# Altium PCB PCB.PcbDoc
Units mil, origin at the board's own origin, x right, y up, seen from the top; angles counter-clockwise.
Board outline 3930 x 2120 mil, 2 copper layers (Top Layer, Bottom Layer); 35 components, 48 nets, 170 pads, 29 vias.
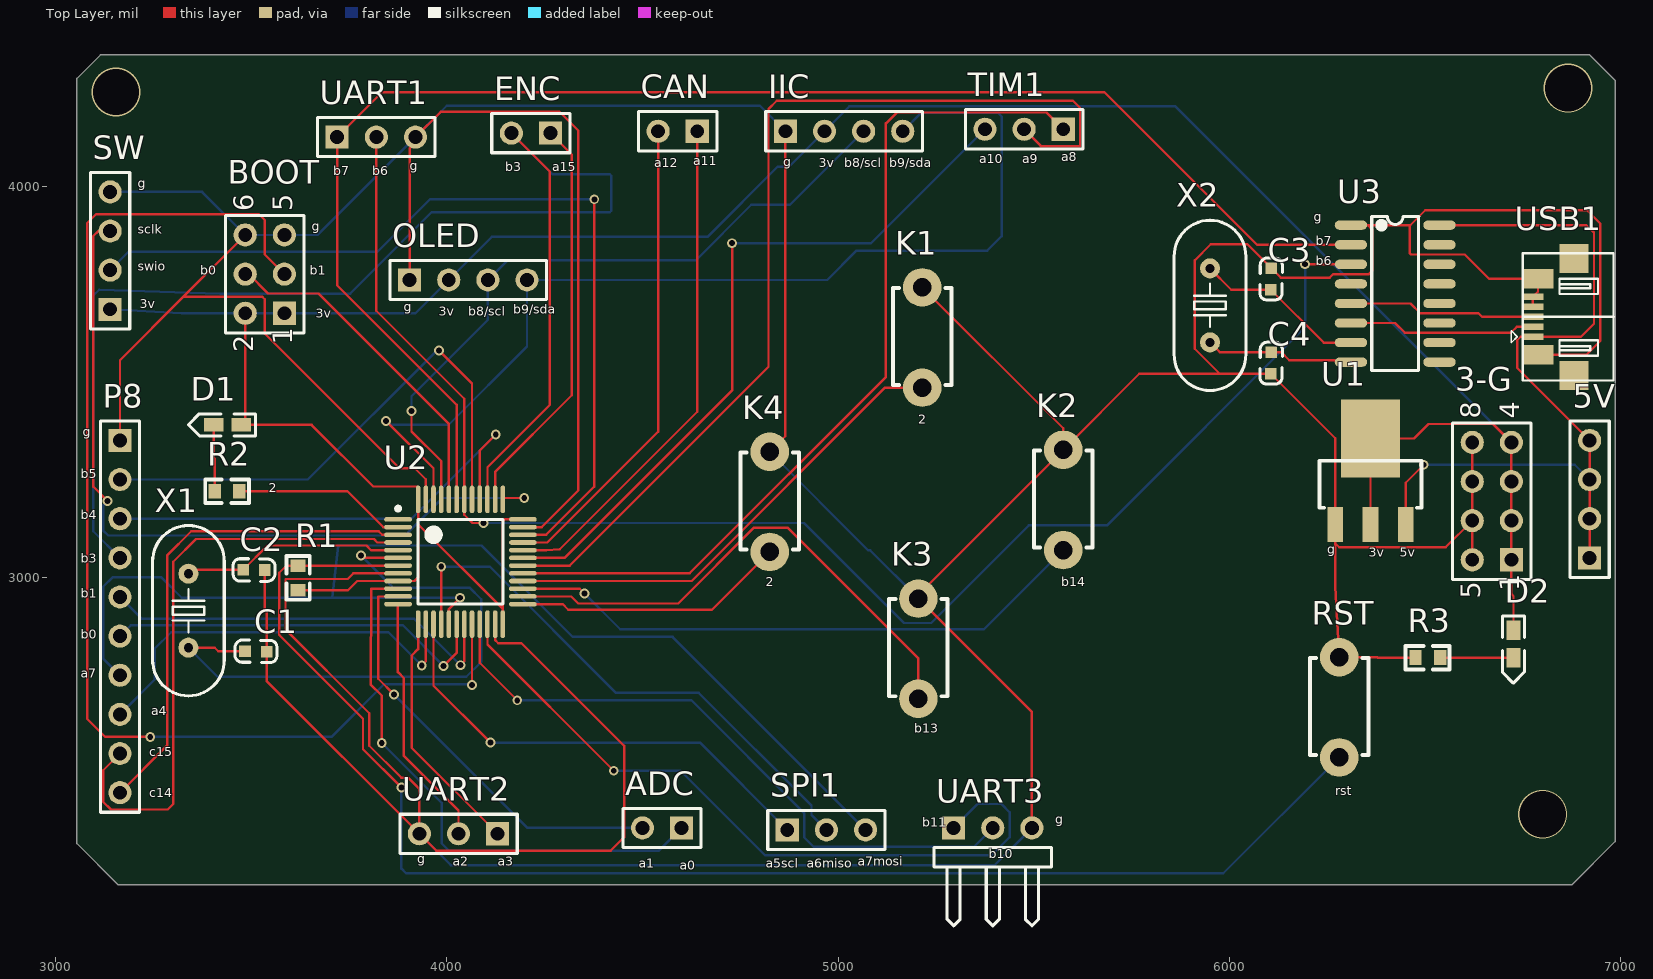
[diagram p0: Top Layer view]
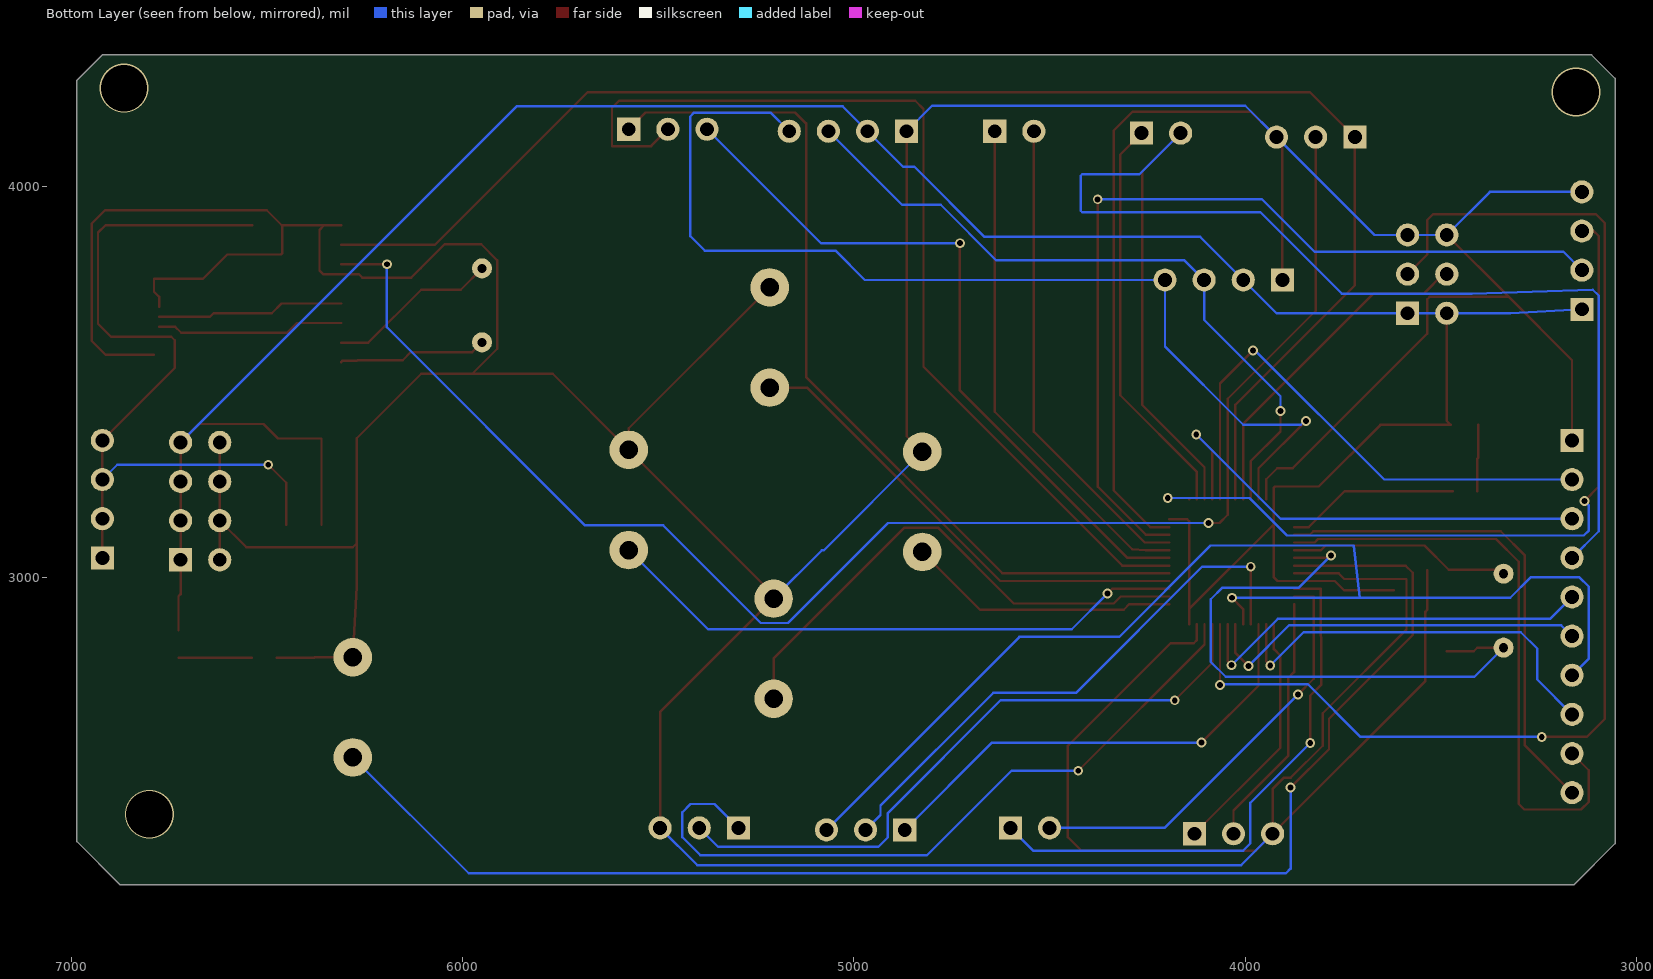
[diagram p1: Bottom Layer view, seen from below]
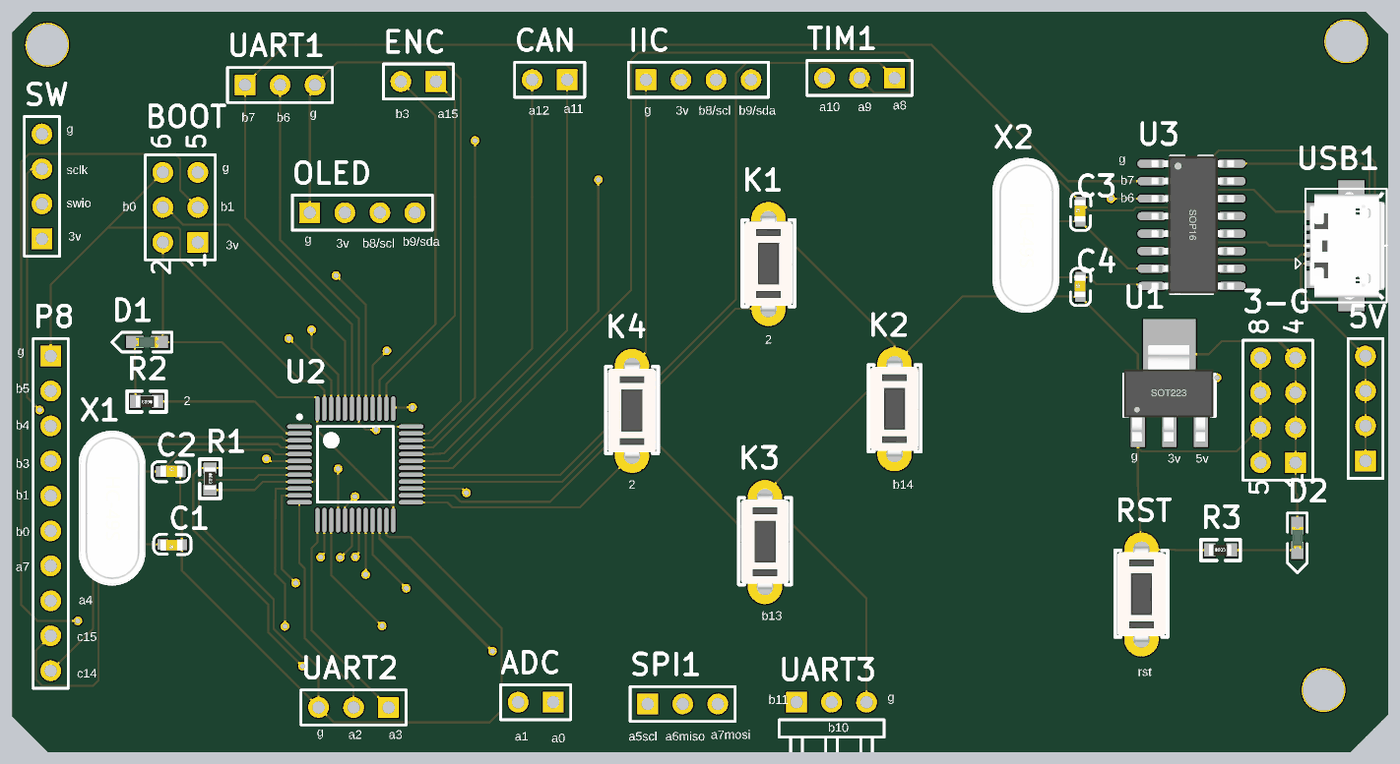
[diagram p2: 3D render of the assembled board from above, using the file's embedded part models]

## Layer stack, top to bottom
Top Solder: solder mask 0.4, Solder Resist, Dk 3.5
Top Layer: signal copper 1.4
Dielectric 1: dielectric 12.6, FR-4, Dk 4.8
Bottom Layer: signal copper 1.4
Bottom Solder: solder mask 0.4, Solder Resist, Dk 3.5

## Board outline
3055,2320 3055,4275 3115,4335 6920,4335 6985,4270 6985,2325 6875,2215 3160,2215

## Design rules (kind name [scope] priority, off if disabled: settings)
Clearance [All] p1: gap=10 ignorepadtopadclearanceinfootprint=FALSE except(0: Arc-Hole Track-Hole SMDPad-Hole THPad-Hole Via-Hole Fill-Hole Poly-Hole Region-Hole Text-Hole)
PolygonConnect [All] p1: connectstyle=Relief reliefconductorwidth=10 reliefentries=4 polygonreliefangle="90 Angle" airgapwidth=10
RoutingVias [All] p1: holewidth=15 width=25 viastyle="Through Hole" minholewidth=15 minwidth=25 maxholewidth=28 maxwidth=50
SolderMaskExpansion [All] p1: expansion=4 istentingtop=FALSE
Width [All] p1: maxlimit=10 minlimit=6 preferedwidth=6 minimp=50.000000 maximp=50.000000 favimp=50.000000
30 further rules are at their usual default settings.

## Components (designator, comment, footprint, x,y, rotation, side; value= is the part's Value field where it differs from the comment)
3-G "3-G" HDR2X4_CEN 6720,3045 r90 top
5V "5V" HDR1X4 6920,3050 r90 top
ADC "ADC" HDR1X2 4600,2360 r180 top
BOOT "BOOT" HDR2X3 3585,3675 r90 top
C1 "CAP" 0603C 3540,2810 r180 top
C2 "CAP" 0603C 3480,3020 r0 top
C3 "CAP" 0603C 6105,3735 r90 top
C4 "CAP" 0603C 6105,3520 r90 top
CAN "CAN" HDR1X2 4640,4140 r180 top
D1 "LED" LED-0603B 3475,3390 r180 top
D2 "LED" LED-0603B 6725,2865 r270 top
ENC "ENC" HDR1X2 4265,4135 r180 top
IIC "IIC" HDR1X4 4865,4140 r0 top
K1 "KEY" DIP-3X6X4.3 5215,3485 r90 top
K2 "KEY" DIP-3X6X4.3 5575,3070 r90 top
K3 "KEY" DIP-3X6X4.3 5205,2690 r90 top
K4 "KEY" DIP-3X6X4.3 4825,3065 r90 top
OLED "IIC-OLED" HDR1X4 3905,3760 r0 top
P8 "Header 10" HDR1X10 3165,3350 r270 top
R1 "RES" 0603R 3620,3030 r270 top
R2 "RES" 0603R 3470,3220 r180 top
R3 "RES" 0603R 6475,2795 r0 top
RST "KEY" DIP-3X6X4.3 6280,2540 r90 top
SPI1 "SPI" HDR1X3 4870,2355 r0 top
SW "SWD" HDR1X4 3140,3685 r90 top
TIM1 "TIM1" HDR1X3 5575,4145 r180 top
U1 "AMS1117" SOT223 6360,3135 r0 top
U2 "STM32F103C8T6" 48P 4035,3040 r0 top
U3 "CH340G" SOP16 6310,3900 r0 top
UART1 "UART1" HDR1X3 3720,4125 r0 top
UART2 "UART2" HDR1X3 4130,2345 r180 top
UART3 "UART3" HDR1X3H 5295,2360 r0 top
USB1 "Micro-USB" USB-MICRO_A 6775,3615 r90 top
X1 "XTAL-2P" "OSC HC-49S" 3340,2915 r270 top
X2 "XTAL-2P" "OSC HC-49S" 5950,3695 r270 top

## Footprints (in the part's own frame and the unit in brackets; to place one, negate y for a bottom-side part, rotate by r counter-clockwise, add the part's x,y. Pads: shape width x height; smd on the part's side, far side on the other; paste and mask are expansions set on the pad)
48P [mm]
  oval 1.8x0.3 smd: 1(-4.05,2.75) 2(-4.05,2.25) 3(-4.05,1.75) 4(-4.05,1.25) 5(-4.05,0.75) 6(-4.05,0.25) 7(-4.05,-0.25) 8(-4.05,-0.75) 9(-4.05,-1.25) 10(-4.05,-1.75) 11(-4.05,-2.25) 12(-4.05,-2.75) 25(4.05,-2.75) 26(4.05,-2.25) 27(4.05,-1.75) 28(4.05,-1.25) 29(4.05,-0.75) 30(4.05,-0.25) 31(4.05,0.25) 32(4.05,0.75) 33(4.05,1.25) 34(4.05,1.75) 35(4.05,2.25) 36(4.05,2.75)
  oval 0.3x1.8 smd: 13(-2.75,-4.05) 14(-2.25,-4.05) 15(-1.75,-4.05) 16(-1.25,-4.05) 17(-0.75,-4.05) 18(-0.25,-4.05) 19(0.25,-4.05) 20(0.75,-4.05) 21(1.25,-4.05) 22(1.75,-4.05) 23(2.25,-4.05) 24(2.75,-4.05) 37(2.75,4.05) 38(2.25,4.05) 39(1.75,4.05) 40(1.25,4.05) 41(0.75,4.05) 42(0.25,4.05) 43(-0.25,4.05) 44(-0.75,4.05) 45(-1.25,4.05) 46(-1.75,4.05) 47(-2.25,4.05) 48(-2.75,4.05)
  silkscreen extent -4.17,-2.75 2.75,3.57, body extent -3.5,-3.5 3.5,3.5, height 1.6
0603C [mil]
  rect 30x30 smd: 1(0.21,-0.35) 2(55.21,-1.35)
  silkscreen extent -26,-30 81,28, body extent -1,-15 62,17, height 12
0603R [mm]
  rect 0.8x0.965 smd: 1(0,0) 2(1.6,0)
  silkscreen extent -0.64,-0.76 2.21,0.76, body extent -0.04,-0.41 1.56,0.41, height 0.45
DIP-3X6X4.3 [mm]
  round 2.5 hole 1.2: 1(0,0) 3(6.5,0)
  silkscreen extent 0.16,-1.9 6.46,1.9, body extent -0.64,-1.75 7.19,1.75, height 4.31
HDR1X2 [mm] "Connector; Header; 2 Position"
  rect 1.5x1.5 hole 0.9: 1(0,0)
  round 1.5 hole 0.9: 2(2.54,0)
  silkscreen extent -1.27,-1.27 3.81,1.27
HDR1X3 [mm] "Connector; Header; 3 Position"
  rect 1.5x1.5 hole 0.9: 1(0,0)
  round 1.5 hole 0.9: 2(2.54,0) 3(5.08,0)
  silkscreen extent -1.27,-1.27 6.35,1.27
HDR1X3H [mm] "Connector; Header; 3 Position; Right Angle"
  rect 1.5x1.5 hole 0.9: 1(0,0)
  round 1.5 hole 0.9: 2(2.54,0) 3(5.08,0)
  silkscreen extent -1.27,-6.35 6.35,-1.27
HDR1X4 [mm] "Connector; Header; 4 Position"
  rect 1.5x1.5 hole 0.9: 1(0,0)
  round 1.5 hole 0.9: 2(2.54,0) 3(5.08,0) 4(7.62,0)
  silkscreen extent -1.27,-1.27 8.89,1.27
HDR1X10 [mm] "Connector; Header; 10 Position"
  rect 1.5x1.5 hole 0.9: 1(0,0)
  round 1.5 hole 0.9: 2(2.54,0) 3(5.08,0) 4(7.62,0) 5(10.16,0) 6(12.7,0) 7(15.24,0) 8(17.78,0) 9(20.32,0) 10(22.86,0)
  silkscreen extent -1.27,-1.27 24.13,1.27
HDR2X3 [mm] "Connector; Header; 3x2 Position"
  rect 1.5x1.5 hole 0.9: 1(0,0)
  round 1.5 hole 0.9: 2(0,2.54) 3(2.54,0) 4(2.54,2.54) 5(5.08,0) 6(5.08,2.54)
  silkscreen extent -1.27,-1.27 6.35,3.81
HDR2X4_CEN [mm] "Connector; Header; 4x2 Position"
  rect 1.5x1.5 hole 0.9: 1(0,0)
  round 1.5 hole 0.9: 2(2.54,0) 3(5.08,0) 4(7.62,0) 5(0,2.54) 6(2.54,2.54) 7(5.08,2.54) 8(7.62,2.54)
  silkscreen extent -1.27,-1.27 8.89,3.81
LED-0603B [mil]
  rect 50x35 smd: A(0,0.26) K(70,0.26)
  silkscreen extent -36,-28 135,28, body extent 4,-15 66,17, height 24
"OSC HC-49S" [mm]
  round 1.3 hole 0.6: 1(-2.4,0) 2(2.4,0)
  silkscreen extent -5.52,-2.32 5.52,2.33, body extent -5.53,-2.29 5.53,2.36, height 4.13
SOP16 [mm]
  oval 2.1x0.6 smd: 1(0,0) 2(0,-1.27) 3(0,-2.54) 4(0,-3.81) 5(0,-5.08) 6(0,-6.35) 7(0,-7.62) 8(0,-8.89) 9(5.75,-8.89) 10(5.75,-7.62) 11(5.75,-6.35) 12(5.75,-5.08) 13(5.75,-3.81) 14(5.75,-2.54) 15(5.75,-1.27) 16(5.75,0)
  silkscreen extent 1.35,-9.44 4.4,0.56, body extent -0.04,-9.45 5.97,0.56, height 1.9
SOT223 [mil]
  rect 40x90 smd: 1(-90,0) 2(0,0) 3(90,0)
  rect 150x200 smd: 2(0,220)
  silkscreen extent -130,43 130,163, body extent -130,-30 126,246, height 65
USB-MICRO_A [mm]
  rect 1.9x1.9 smd: 0(-2.515,-2.667) 0(5.08,-2.667)
  rect 0.4x1.4 smd: 1(0,0) 2(0.648,0) 3(1.295,0) 4(1.943,0) 5(2.591,0)
  rect 1.25x2 smd: 5(-1.168,-0.33) 5(3.759,-0.33)
  silkscreen extent -2.84,-5.24 5.41,1.4, body extent -2.71,-5.08 5.25,0.34, height 2.69

## Part data
3-G: library part "Header 4X2A", "Header, 4-Pin, Dual row", LatestRevisionDate=17-Jul-2002, LatestRevisionNote="Re-released for DXP Platform.", Publisher="Altium Limited"
5V IIC OLED SW: library part "Header 4", "Header, 4-Pin", LatestRevisionDate=17-Jul-2002, LatestRevisionNote="Re-released for DXP Platform.", Publisher="Altium Limited"
ADC CAN ENC: library part "Header 2", "Header, 2-Pin", LatestRevisionDate=17-Jul-2002, LatestRevisionNote="Re-released for DXP Platform.", Publisher="Altium Limited"
BOOT: library part "Header 3X2", "Header, 3-Pin, Dual row", LatestRevisionDate=17-Jul-2002, LatestRevisionNote="Re-released for DXP Platform.", Publisher="Altium Limited"
C1 C2 C3 C4: "无极性电容"
P8: "Header, 10-Pin", LatestRevisionDate=17-Jul-2002, LatestRevisionNote="Re-released for DXP Platform.", Publisher="Altium Limited"
SPI1 TIM1 UART1 UART2: library part "Header 3", "Header, 3-Pin", LatestRevisionDate=17-Jul-2002, LatestRevisionNote="Re-released for DXP Platform.", Publisher="Altium Limited"
U1: "三端稳压芯片"
UART3: library part "Header 3H", "Header, 3-Pin, Right Angle", LatestRevisionDate=17-Jul-2002, LatestRevisionNote="Re-released for DXP Platform.", Publisher="Altium Limited"
X1 X2: "2脚无源脚晶振"

## Via types
v1: diameter 25, hole 15, Top Layer to Bottom Layer, 26 vias
v2: diameter 125, hole 118.11, Top Layer to Bottom Layer, 3 vias

## Nets (pads, with @x,y where several pads share a name; then routed paths per layer and width w, separated by ;. In a path a pad name is that pad's centre, name@x,y a point inside that pad or via, vN(x,y) a via of type N, cw(c..) or ccw(c..) an arc to the next point about the centre after c; other vN are vias at no path point)
3v: 3-G.1 3-G.2 3-G.3 3-G.4 BOOT.1 BOOT.2 D1.A D2.A IIC.2 OLED.2 R1.2 SW.1 U1.2 U2.9 U2.24 U2.36 U2.48 | length 7231.1
  Top Layer w6: BOOT.2 3485,3399.75 D1.A 3654.76,3389.74 3812.4,3232.1 3923.63,3232.1 3926.73,3229 U2.48 3926.73,3136 ; R1.2 3747.72,2967.01 3771.5,2990.79 U2.9 3917.52,2990.79 3926.73,3000 3926.73,3136 ; U2.24 4143.27,2919.46 ; U2.36 4148.27,3148.27 4143.27,3143.27 4143.27,2919.46 ; U1.2@6360,3135 6360,3355 6471,3355 6508,3392 6673,3392 3-G.4 3-G.3 3-G.2 3-G.1 6720,2957.26 6725.26,2952 D2.A ; 3926.73,3136 4143.27,2919.46
  Bottom Layer w6: SW.1 3323,3675 BOOT.2 BOOT.1 3920,3675 OLED.2 4115,3870 4666,3870 4845,4049 4874,4049 IIC.2 5028.53,4203.53 5861.47,4203.53 3-G.4
BOOT0: BOOT.4 U2.44 | length 871.7
  Top Layer w6: BOOT.4 3493.91,3775 3543.53,3725.38 3672.09,3725.38 4005.47,3392 U2.44
BOOT1/PB2: BOOT.3 U2.20 | length 3109.3
  Top Layer w6: v1(3242.47,2592.53) 3127.47,2592.53 3081,2639 3081,3905 3104,3928 3520,3928 3535,3913 3535,3825 BOOT.3 ; v1(4064.53,2725) U2.20
  Bottom Layer w6: v1(3242.47,2592.53) 3705.53,2592.53 3840,2727 4062.53,2727 v1(4064.53,2725)
D+: U3.5 USB1.3 | length 479.1
  Top Layer w6: U3.5 6462,3700 6487,3675 6636,3675 6645,3666 USB1.3
D-: U3.6 USB1.2 | length 481.8
  Top Layer w6: U3.6 6423,3650 6448,3625 6718.5,3625 6734,3640.5 USB1.2
GND: 3-G.5 3-G.6 3-G.7 3-G.8 BOOT.5 BOOT.6 C1.1 C2.2 C3.2 C4.1 IIC.1 K1.3 K2.3 K3.3 K4.3 OLED.1 P8.1 R3.1 RST.3 SW.4 U1.1 U2.8 U2.23 U2.35 U2.47 U3.1 UART1.3 UART2.3 UART3.3 USB1.4 USB1.5 | length 18333.3
  Top Layer w6: P8.1 3165,3555 3327.53,3717.53 ; BOOT.6 3327.53,3717.53 ; C2.2 3535.21,2916.58 3539.79,2912 C1.1 3539.79,2735.21 UART2.3 ; U2.8 3761.47,3010.47 3747,2996 3588,2996 3588,2867 3802,2653 3802,2570.08 3883.58,2488.5 3901,2488.5 3930,2459.5 UART2.3 ; OLED.1 3905,4095.64 3920,4110.64 UART1.3 3985,4190 4288,4190 4336,4142 4336,3222 4242.58,3128.58 U2.35 ; U2.47 3946.42,3251 3918.42,3279 3879,3279 3535,3623 3535,3710.53 3528,3717.53 3327.53,3717.53 ; U2.23 4123.58,2840 4131.58,2832 4191,2832 4453,2570 4453,2336 4419,2302 3973,2302 UART2.3 ; K4.3 4865,3360.91 IIC.1 ; K1.3 5575,3380.91 K2.3 ; UART3.3 5495,2655.91 K3.3 5205,2955.91 K2.3 ; U3.1 6353,3900 ; 6462,3900 6353,3900 ; R3.1 6377.91,2795 6377,2795.91 RST.3 6270,2976 6270,3087 ; 3-G.5 3-G.6 ; 3-G.8 3-G.7 3-G.6 ; USB1.4 6775,3717 6788,3730 6788,3763 6663,3763 6601,3825 6480,3825 6463.92,3825 6460.4,3828.51 6460.4,3898.4 6500,3938 6913,3938 6947,3904 6947,3604 6912,3569 USB1.5@6788,3569 ; K2.3 5769.31,3520.21 5974.79,3520.21 ; 5974.79,3520.21 5911,3584 5911,3810 5952,3851 6045.57,3851 C3.2 6130.57,3766 6256,3766 6265,3775 6356,3775 6365,3784 6365,3888 6353,3900 ; 5974.79,3520.21 C4.1 6270,3355.57 U1.1 6270,3087 ; 6270,3087 6280,3077 6552,3077 3-G.6
  Bottom Layer w6: SW.4 3375,3985 BOOT.6 BOOT.5 3670,3875 UART1.3 4000,4205 4800,4205 IIC.1 ; UART2.3 4010,2265 5400,2265 UART3.3 ; K4.3 5076.91,3069 5081.91,3069 K3.3
NetC1_2: C1.2 U2.6 X1.2 | length 1553.7
  Top Layer w6: X1.2 3407,2820.51 3416.16,2811.35 C1.2 ; v1(3781,3056) 3787.16,3049.84 U2.6
  Bottom Layer w6: X1.2 3414.51,2746 4050,2746 4088,2784 4088,2944 4058,2974 3863,2974 v1(3781,3056)
NetC2_1: C2.1 U2.5 X1.1 | length 570.3
  Top Layer w6: X1.1 3350.16,3019.65 C2.1 3542.07,3081.5 3794.53,3081.5 3806.5,3069.53 U2.5
NetC3_1: C3.1 U3.7 X2.1 | length 438.5
  Top Layer w6: X2.1 6004.28,3735.21 C3.1 6240.57,3600 U3.7
NetC4_2: C4.2 U3.8 X2.2 | length 380.9
  Top Layer w6: X2.2 5975.3,3575.21 C4.2 6132.35,3575.21 6152.57,3555 6268.15,3555 6269.77,3553.37 6306.63,3553.37 U3.8
NetD1_K: D1.K R2.2 | length 170.6
  Top Layer w6: D1.K 3405,3305.01 3407.01,3303 R2.2
NetD2_K: D2.K R3.2 | length 187.3
  Top Layer w6: R3.2 6631,2795 D2.K
PA0: ADC.1 U2.10 | length 1439.2
  Top Layer w6: v1(3834,2577) 3834,2697.92 3805.5,2726.42 3807.13,2971.1 U2.10
  Bottom Layer w6: v1(3834,2577) 3987,2424 3987,2320 4005,2302 4542,2302 ADC.1
PA1: ADC.2 U2.11 | length 1093.8
  Top Layer w6: v1(3865,2701) 3825,2741 3825,2951.42 U2.11
  Bottom Layer w6: v1(3865,2701) 4206,2360 ADC.2
PA2: U2.12 UART2.2 | length 651.5
  Top Layer w6: U2.12 3875,2931.73 3875,2758 3890.5,2742.5 3890.5,2544.08 4030,2404.58 UART2.2
PA3: U2.13 UART2.1 | length 633.2
  Top Layer w6: U2.13 3926.73,2816.73 3910.5,2800.5 3910.5,2564.5 UART2.1
PA4: P8.8 U2.14 | length 1049.3
  Top Layer w6: v1(3936,2775) 3946.42,2785.42 U2.14
  Bottom Layer w6: P8.8 3254,2739 3254,2818 3296,2860 3851,2860 v1(3936,2775)
PA5: SPI1.1 U2.15 | length 1213.7
  Top Layer w6: U2.15 3966.1,2723.31 v1(4111.41,2578)
  Bottom Layer w6: v1(4111.41,2578) 4647,2578 SPI1.1
PA6: SPI1.2 U2.16 | length 1423.8
  Top Layer w6: U2.16 v1(3985.79,3027.5)
  Bottom Layer w6: v1(3985.79,3027.5) 4110.1,3027.5 4432.6,2705 4644.03,2705 4932.01,2417.01 4932.01,2392.99 SPI1.2
PA7: P8.7 SPI1.3 U2.17 | length 3049.4
  Top Layer w6: U2.17 4005.47,2919.47 v1(4034,2948)
  Bottom Layer w6: P8.7 3122,2793 3122,2976 3146,3000 3271,3000 3323,2948 3707.1,2948 ; v1(4034,2948) 3707.1,2948 ; SPI1.3 4577,2848 4322.07,2848 4088.57,3081.5 3722.48,3081.5 3707.1,2948
PA8: TIM1.1 U2.29 | length 2265.7
  Top Layer w6: U2.29 4620.47,3010.47 5122,3512 5122,4160 5150,4188 5532,4188 TIM1.1
PA9: TIM1.2 U2.30 | length 2567.9
  Top Layer w6: U2.30 4314.16,3030.16 4822,3538 4822,4197 4843,4218 5600,4218 5618,4200 5618,4102 5518,4102 TIM1.2
PA10: TIM1.3 U2.31 | length 1854.5
  Top Layer w6: U2.31 4300.95,3049.84 4729,3477.9 v1(4729,3854)
  Bottom Layer w6: v1(4729,3854) 5084,3854 TIM1.3
PA11: CAN.1 U2.32 | length 1307.9
  Top Layer w6: U2.32 4254.53,3069.53 4288.49,3071.79 4640,3423.31 CAN.1
PA12: CAN.2 U2.33 | length 1230.5
  Top Layer w6: U2.33 4256.83,3089.21 4540,3372.38 CAN.2
PA15: ENC.1 U2.38 | length 1039.3
  Top Layer w6: U2.38 4123.58,3269.37 4319.49,3465.28 4319.49,4080.51 ENC.1
PB0: P8.6 U2.18 | length 1002
  Top Layer w6: v1(3992,2774) 4025.16,2807.16 U2.18
  Bottom Layer w6: P8.6 3193,2878 3888,2878 v1(3992,2774)
PB1: P8.5 U2.19 | length 1050.9
  Top Layer w6: v1(4035,2775.84) 4044.84,2785.68 U2.19
  Bottom Layer w6: P8.5 3221,2894 3916.84,2894 v1(4035,2775.84)
PB3: ENC.2 P8.4 U2.39 | length 3547.6
  Top Layer w6: U2.39 4103.9,3281.69 4263.53,3441.32 4263.53,4036.47 ENC.2
  Bottom Layer w6: P8.4 3097,3118 3097,3720 3112,3735 3421,3725 3753,3725 3961,3933 4416.49,3933 4420,3936.51 4420,4026.49 4416.49,4030 4270,4030 ENC.2
PB4: P8.3 U2.40 | length 1231.5
  Top Layer w6: U2.40 4084.21,3324.21 v1(4125,3365)
  Bottom Layer w6: P8.3 3910,3150 v1(4125,3365)
PB5: P8.2 U2.41 | length 1367.3
  Top Layer w6: v1(3980,3580) 4064.53,3495.47 U2.41
  Bottom Layer w6: P8.2 3645,3250 3975,3580 v1(3980,3580)
PB6: U2.42 U3.3 UART1.2 | length 3911.6
  Top Layer w6: UART1.2 3820,3681.24 4044.84,3456.39 U2.42 4044.84,3160 4065.84,3139 v1(4094,3139) ; v1(6193,3800) U3.3
  Bottom Layer w6: v1(4094,3139) 4912.69,3139 5168,2883.69 5237.69,2883.69 5487,3133 5687,3133 6193,3639 v1(6193,3800)
PB7: U2.43 U3.2 UART1.1 | length 3851.1
  Top Layer w6: U2.43 4025.16,3441 3720,3746.16 UART1.1 3835,4240 5680,4240 6070,3850 U3.2
PB8: IIC.3 OLED.3 U2.45 | length 1790.1
  Top Layer w6: v1(3910,3425) 3910,3373 3985.79,3297.21 U2.45
  Bottom Layer w6: v1(3910,3425) 3910,3463.1 4105,3658.1 OLED.3 4155,3810 4636,3810 4778,3952 4877,3952 IIC.3
PB9: IIC.4 OLED.4 U2.46 | length 2709.4
  Top Layer w6: v1(3845,3400) 3966.1,3278.9 U2.46
  Bottom Layer w6: v1(3845,3400) 3848.01,3400 3858.01,3390 4005,3390 4205,3590 OLED.4 4972,3760 5047,3835 5381,3835 5418,3872 5418,4177.53 5408,4187.53 5212.53,4187.53 IIC.4
PB10: U2.21 UART3.2 | length 1660.3
  Top Layer w6: U2.21 4084.21,2781.79 v1(4180,2686)
  Bottom Layer w6: v1(4180,2686) 4625,2686 4913,2398 4913,2336 4937,2312 5347,2312 UART3.2
PB11: U2.22 UART3.1 | length 1869
  Top Layer w6: U2.22 4103.9,2828.8 v1(4426.7,2506)
  Bottom Layer w6: v1(4426.7,2506) 4597,2506 4813,2290 5392,2290 5438,2336 5438,2400 5417,2421 5356,2421 UART3.1
PB12: K4.1 U2.25 | length 697.5
  Top Layer w6: U2.25 4296.27,2931.73 4310.5,2917.5 4677.5,2917.5 K4.1
PB13: K3.1 U2.26 | length 1339.6
  Top Layer w6: U2.26 4318.08,2951.42 4336,2933.5 4591.5,2933.5 4785.21,3127.21 4870.79,3127.21 5205,2793 K3.1
PB14: K2.1 U2.27 | length 1507.2
  Top Layer w6: U2.27 4339.9,2971.1 v1(4352,2959)
  Bottom Layer w6: v1(4352,2959) 4443.31,2867.69 5372.69,2867.69 K2.1
PB15: K1.1 U2.28 | length 1225.3
  Top Layer w6: U2.28 4625.79,2990.79 5120,3485 K1.1
PC13: R2.1 U2.2 | length 443.4
  Top Layer w6: R2.1 3746.5,3220 3837.92,3128.58 U2.2
PC14: P8.10 U2.3 | length 1275.4
  Top Layer w6: P8.10 3285.41,2570.41 3285.41,3056 3347.38,3117.97 3825.9,3117.97 3834.97,3108.9 U2.3
PC15: P8.9 U2.4 | length 1554.5
  Top Layer w6: P8.9 3122.47,2507.47 3122.47,2426.53 3142,2407 3287,2407 3301.41,2421.41 3301.41,3040 3359.41,3098 3813.71,3098 3822.5,3089.21 U2.4
RST: R1.1 RST.1 U2.7 | length 3719.7
  Top Layer w6: U2.7 3767.47,3030.16 3767.31,3030 R1.1 3590.25,3030 3572,3011.76 3572,2853 3786,2639 3786,2561 v1(3884,2463)
  Bottom Layer w6: v1(3884,2463) 3884,2256 3896,2244 5984,2244 RST.1
SCLK: SW.3 U2.37 | length 1999.7
  Top Layer w6: v1(3133.5,3195.5) 3097,3232 3097,3872 3110,3885 SW.3 ; U2.37 4143.27,3203 v1(4198,3203)
  Bottom Layer w6: v1(3133.5,3195.5) 3122,3184 3122,3120 3135,3107 3893,3107 3989,3203 v1(4198,3203)
SWIO: SW.2 U2.34 | length 2279.5
  Top Layer w6: U2.34 4253.89,3108.9 4377,3232.01 v1(4377,3966)
  Bottom Layer w6: SW.2 3187,3832 3823,3832 3957,3966 v1(4377,3966)
USB+: 5V.1 5V.2 5V.3 5V.4 U1.3 U3.16 USB1.1 | length 2093.3
  Top Layer w6: U1.3 6450,3242 v1(6496,3288) ; U3.16 6912,3900 6931,3881 6931,3648 6898,3615 USB1.1 6744,3615 6735,3606 6735,3535 5V.4 5V.3 5V.2 5V.1
  Bottom Layer w6: v1(6496,3288) 6882,3288 5V.3
pads on no net: U2.1 U3.4 U3.9 U3.10 U3.11 U3.12 U3.13 U3.14 U3.15 USB1.0
copper on no net:
  other v2: 6800,2395 3155,4240 6865,4250

## Silkscreen, mask and mechanical layers (free items; w line width, h text height)
Top Overlay:
  text "a8" at 5570,4055.44 h40
  text "a10" at 5360,4050.44 h40
  text "a9" at 5470,4050.44 h40
  text "a11" at 4630,4045.41 h40
  text "g" at 4860,4042.51 h40
  text "a12" at 4530,4040.41 h40
  text "3v" at 4950,4040.44 h40
  text "b8/scl" at 5015,4040.44 h40
  text "b9/sda" at 5130,4040.44 h40
  text "g" at 3905,4032.51 h40
  text "b3" at 4150,4030.44 h40
  text "a15" at 4270,4030.44 h40
  text "b7" at 3710,4020.41 h40
  text "b6" at 3810,4020.44 h40
  text "g" at 3210,3987.51 h40
  text "g" at 6215,3902.51 h40
  text "g" at 3655,3877.51 h40
  text "sclk" at 3210,3870.41 h40
  text "b7" at 6220,3840.41 h40
  text "b6" at 6220,3790.44 h40
  text "swio" at 3210,3775.41 h40
  text "b0" at 3370,3765.44 h40
  text "b1" at 3650,3765.41 h40
  text "3v" at 3215,3680.44 h40
  text "g" at 3890,3672.51 h40
  text "b9/sda" at 4170,3665.44 h40
  text "3v" at 3980,3660.44 h40
  text "b8/scl" at 4055,3660.44 h40
  text "3v" at 3665,3655.44 h40
  text "2" at 5204.96,3385 h40
  text "g" at 3070,3352.51 h40
  text "b5" at 3065,3245.44 h40
  text "2" at 3544.96,3210 h40
  text "b4" at 3065,3140.41 h40
  text "g" at 6250,3052.51 h40
  text "3v" at 6355,3045.44 h40
  text "5v" at 6435,3045.44 h40
  text "b3" at 3065,3030.44 h40
  text "2" at 4814.96,2970 h40
  text "b14" at 5570,2970.41 h40
  text "b1" at 3065,2940.41 h40
  text "b0" at 3065,2835.44 h40
  text "a7" at 3065,2735.41 h40
  text "a4" at 3245,2640.41 h40
  text "b13" at 5195,2595.44 h40
  text "c15" at 3240,2535.44 h40
  text "rst" at 6270,2435.41 h40
  text "c14" at 3240,2430.41 h40
  text "g" at 5555,2362.51 h40
  text "b11" at 5215,2355.41 h40
  text "b10" at 5385,2275.44 h40
  text "g" at 3925,2262.51 h40
  text "a2" at 4015,2255.41 h40
  text "a3" at 4130,2255.44 h40
  text "a7mosi" at 5050,2255.41 h40
  text "a1" at 4490,2250.41 h40
  text "a5scl" at 4815,2250.44 h40
  text "a6miso" at 4920,2250.44 h40
  text "a0" at 4595,2245.44 h40
Mechanical 1:
  lines w10: 3055,2320 3055,4275 3115,4335 3130,4335 3417.81,4335 3857.89,4335 4046.8,4335 4186.25,4335 5768.75,4335 5939.61,4335 6065.7,4335 6216.56,4335 6452.19,4335 6920,4335 6985,4270 6985,2325 6875,2215 3160,2215 3055,2320

## Text inside footprints (layer, text, board x,y; h text height)
3-G: Top Overlay "5" at 6640,2945 h50 r90; Top Overlay "1" at 6740,2965 h50 r90; Top Overlay "4" at 6740,3405 h50 r90; Top Overlay "8" at 6640,3405 h50 r90
BOOT: Top Overlay "6" at 3505,3935 h50 r90; Top Overlay "5" at 3605,3935 h50 r90; Top Overlay "2" at 3505,3575 h50 r90; Top Overlay "1" at 3605,3595 h50 r90